# Altium PCB ECG_PCB.PcbDoc
Units mil, origin at the board's own origin, x right, y up, seen from the top; angles counter-clockwise.
Board outline 4759.34 x 1830 mil, 2 copper layers (Top Layer, Bottom Layer); 33 components, 22 nets, 108 pads, 23 vias.
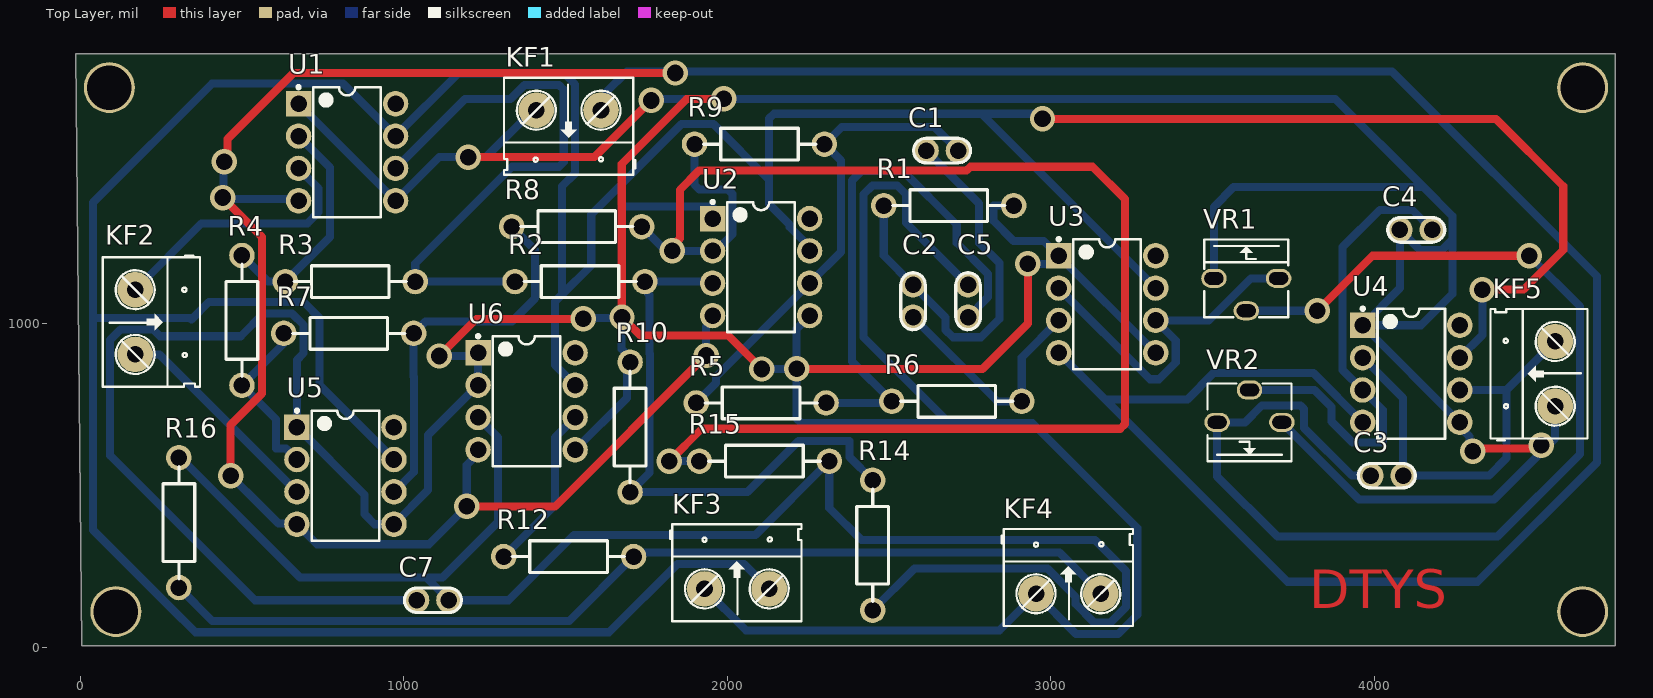
[diagram p0: Top Layer view]
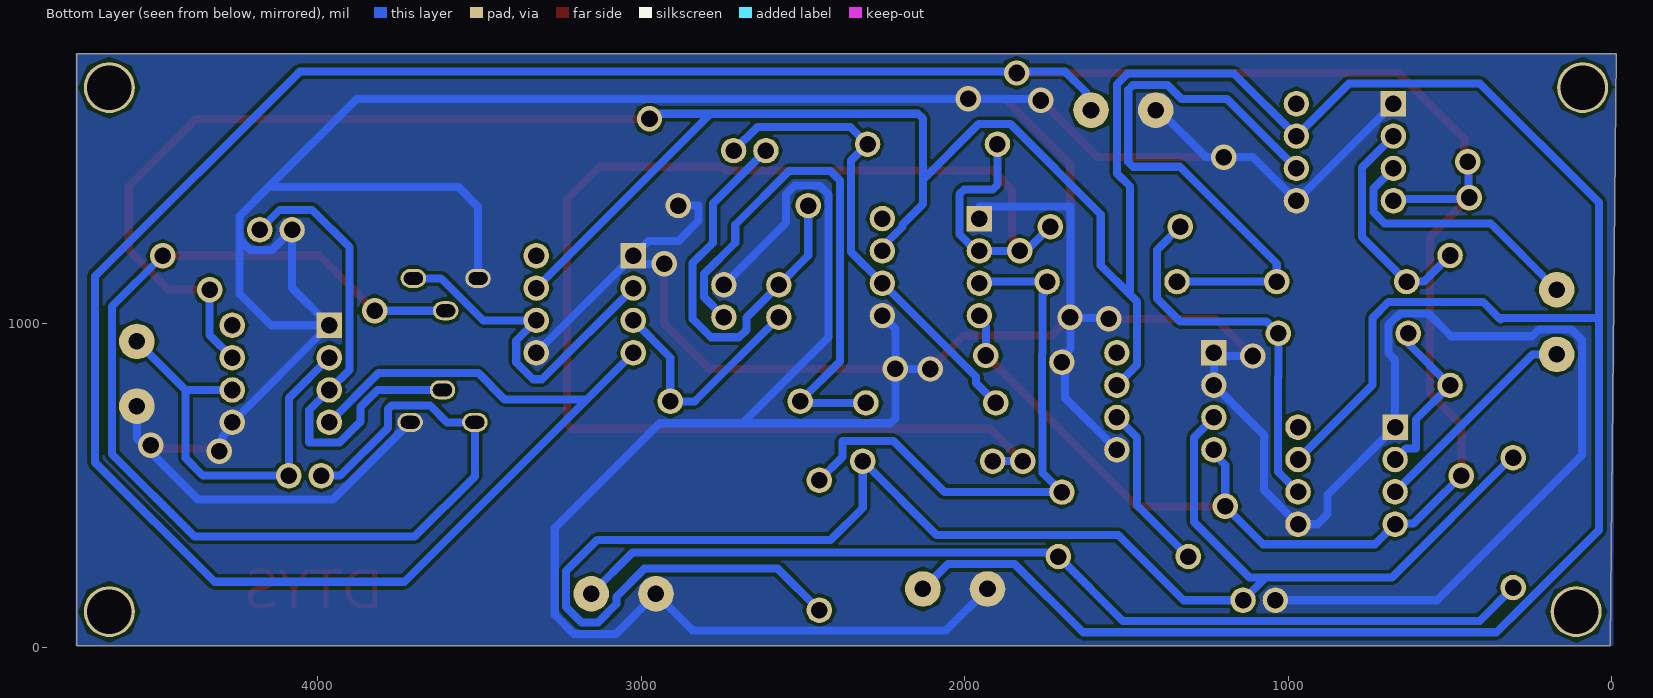
[diagram p1: Bottom Layer view, seen from below]
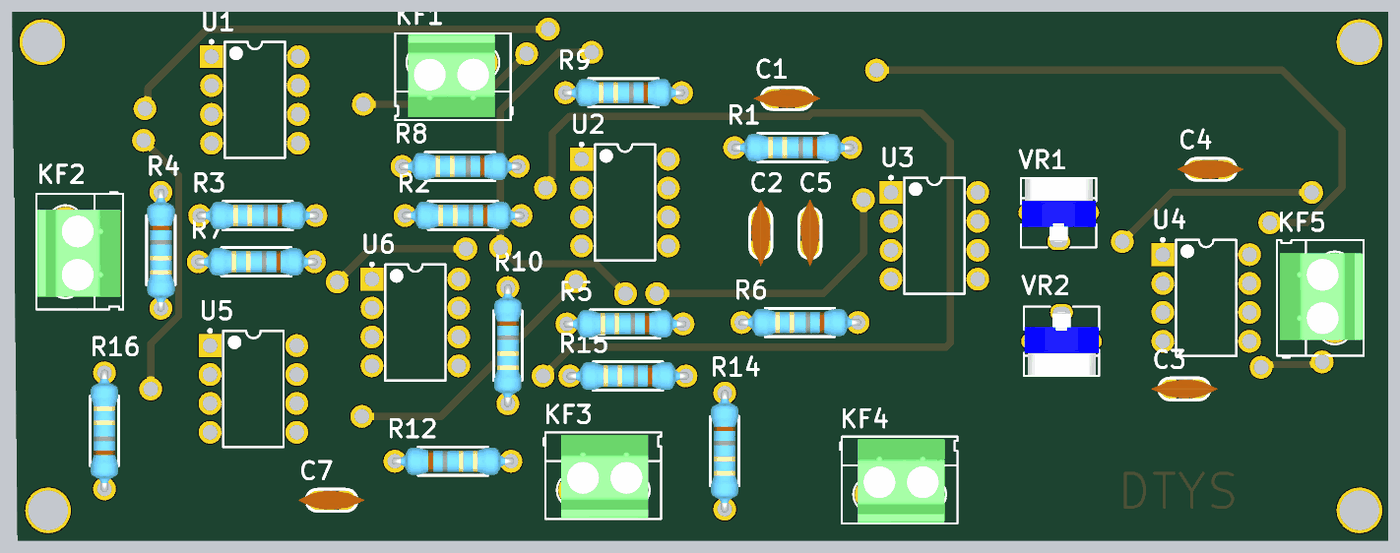
[diagram p2: 3D render of the assembled board from above, using the file's embedded part models]

## Layer stack, top to bottom
Top Solder: solder mask 0.4, Solder Resist, Dk 3.5
Top Layer: signal copper 1.4
Dielectric 1: dielectric 12.6, FR-4, Dk 4.8
Bottom Layer: signal copper 1.4
Bottom Solder: solder mask 0.4, Solder Resist, Dk 3.5

## Board outline
-14.34,1835 4745,1835 4745,5 4.29,5

## Design rules (kind name [scope] priority, off if disabled: settings)
Clearance Clearance_1 [All] p1: gap=9.84 ignorepadtopadclearanceinfootprint=FALSE
Clearance [All] p2: gap=9.84 ignorepadtopadclearanceinfootprint=FALSE
PolygonConnect PolygonConnect_2 [All vs IsNamedPolygon('GND_L02_P000')] p1: thpad.connectstyle=Direct thpad.reliefconductorwidth=10 thpad.reliefentries=4 thpad.polygonreliefangle="90 Angle" thpad.airgapwidth=10 smdpad.connectstyle=Relief smdpad.reliefconductorwidth=10 smdpad.reliefentries=4 smdpad.polygonreliefangle="90 Angle" smdpad.airgapwidth=10 via.connectstyle=Direct via.reliefconductorwidth=10 via.reliefentries=4 via.polygonreliefangle="90 Angle" via.airgapwidth=10
PolygonConnect PolygonConnect_1 [All vs IsNamedPolygon('GND_L02_P000')] p2: thpad.connectstyle=Direct thpad.reliefconductorwidth=10 thpad.reliefentries=4 thpad.polygonreliefangle="90 Angle" thpad.airgapwidth=10 smdpad.connectstyle=Relief smdpad.reliefconductorwidth=10 smdpad.reliefentries=4 smdpad.polygonreliefangle="90 Angle" smdpad.airgapwidth=10 via.connectstyle=Direct via.reliefconductorwidth=10 via.reliefentries=4 via.polygonreliefangle="90 Angle" via.airgapwidth=10
PolygonConnect [All] p3: connectstyle=Relief reliefconductorwidth=10 reliefentries=4 polygonreliefangle="90 Angle" airgapwidth=10
RoutingVias [All] p1: holewidth=28 width=50 viastyle="Through Hole" minholewidth=28 minwidth=50 maxholewidth=28 maxwidth=50
SolderMaskExpansion [All] p1: expansion=4 istentingtop=FALSE
Width [All] p1: maxlimit=35 minlimit=20 preferedwidth=25
30 further rules are at their usual default settings.

## Components (designator, comment, footprint, x,y, rotation, side; value= is the part's Value field where it differs from the comment)
C1 "0.1u" "tu gom" 2665,1535 r0 top
C2 "0.1u" "tu gom" 2575,1070 r90 top
C3 "0.1u" "tu gom" 4040,530 r0 top
C4 "0.1u" "tu gom" 4130,1290 r180 top
C5 "0.2u" "tu gom" 2745,1070 r90 top
C7 "100n" "tu gom" 1090,145 r180 top
KF1 "CON 2 KF301" "Con 2 KF301 5.08" 1610,1660 r180 top
KF2 "CON 2 KF301" "Con 2 KF301 5.08" 170,1105 r270 top
KF3 "CON 2 KF301" "Con 2 KF301 5.08" 1930,180 r0 top
KF4 "CON 2 KF301" "Con 2 KF301 5.08" 2955,165 r0 top
KF5 "CON 2 KF301" "Con 2 KF301 5.08" 4560,745 r90 top
R1 "16k" "tro vach 1/4w" 2685,1365 r0 top
R2 "10k" "tro vach 1/4w" 1545,1130 r0 top
R3 "56k" "tro vach 1/4w" 835,1130 r0 top
R4 "1k" "tro vach 1/4w" 500,1010 r90 top
R5 "32k" "tro vach 1/4w" 2105,755 r0 top
R6 "32k" "tro vach 1/4w" 2710,760 r0 top
R7 "56k" "tro vach 1/4w" 830,970 r0 top
R8 "10k" "tro vach 1/4w" 1535,1300 r0 top
R9 "100k" "tro vach 1/4w" 2100,1555 r0 top
R10 "100k" "tro vach 1/4w" 1700,680 r90 top
R12 "110k" "tro vach 1/4w" 1510,280 r180 top
R14 "3k" "tro vach 1/4w" 2450,315 r90 top
R15 "3k" "tro vach 1/4w" 2115,575 r0 top
R16 "3k" "tro vach 1/4w" 305,385 r270 top
U1 "LM741CN/NOPB" P0008A 825,1530 r0 top
U2 "LM741CN/NOPB" P0008A 2105,1175 r0 top
U3 "LM741CN/NOPB" P0008A 3175,1060 r0 top
U4 "LM741CN/NOPB" P0008A 4115,845 r0 top
U5 "B" P0008A 820,530 r0 top
U6 "B" P0008A 1380,760 r0 top
VR1 "7.5k" "Bien Tro Tam Giac Nam" 3705,1140 r90 top
VR2 "7.5k" "Bien Tro Tam Giac Nam" 3515,695 r270 top

## Footprints (in the part's own frame and the unit in brackets; to place one, negate y for a bottom-side part, rotate by r counter-clockwise, add the part's x,y. Pads: shape width x height; smd on the part's side, far side on the other; paste and mask are expansions set on the pad)
"Bien Tro Tam Giac Nam" [mm] "RM063"
  oval 1.5x2 hole 1 slot 1.5 at 90 deg: 1(0,0) 2(-2.54,2.54) 3(0,5.08)
  silkscreen extent -3.05,-0.76 3.05,5.84, body extent -2.68,-0.71 2.95,5.79, height 9.5
"Con 2 KF301 5.08" [mil]
  round 110 hole 51.18: 1(0,0) 2(200,0)
  silkscreen extent -106,-100 300,200, body extent -45,-97 255,190, height 335
P0008A [mm] "DIP, 8-Leads, Body 10.15x6.6mm, Pitch 2.54mm"
  rect 2x2 hole 1.3: 1(-3.81,3.81)
  round 2 hole 1.3: 2(-3.81,1.27) 3(-3.81,-1.27) 4(-3.81,-3.81) 5(3.81,-3.81) 6(3.81,-1.27) 7(3.81,1.27) 8(3.81,3.81)
  silkscreen extent -3.93,-5.1 2.65,5.23, body extent -3.95,-5.07 3.95,5.07, height 5.08
"tro vach 1/4w" [mm]
  round 2 hole 1.3: 1(-5.1,0) 2(5.1,0)
  silkscreen extent -4.39,-1.25 4.42,1.25, body extent -5.38,-1.2 5.38,1.2, height 2.41
"tu gom" [mm] "Tu gom mini"
  round 2 hole 1.3: 1(-1.27,0) 2(1.27,0)
  silkscreen extent -2.25,-0.97 2.22,0.97, body extent -2.92,-0.85 2.92,0.85, height 6.12

## Part data
C1 C2 C3 C4 C5 C7: library part CMP-001-00153-1, "C?m", Chung_Loai=C?m, Component Type=Standard, Design Item ID="Tu gom 47pF 50V", Don_Vi=Con, Ma_Hang=MH004779, Pins=2, So_Chan=2, Source="Tu dien.SchLib", Ten_Linh_Kien="T? g?m 47P 50V"
KF1 KF2 KF3: library part CMP-002-00076-1, "C?m", Chung_Loai=C?m, Component Type=Standard, Design Item ID="CON 2 KF301", Don_Vi=Con, Ma_Hang=MH000987, Pins=2, Source=Connector.SchLib, Ten_Linh_Kien="CON 2 KF301-2P 5.08MM Xanh Dýõng"
KF4 KF5: "Cắm", Chung_Loai=Cắm, Don_Vi=Con, Ma_Hang=MH000987, Ten_Linh_Kien="CON 2 KF301-2P 5.08MM Xanh Dương"
R1 R2 R3 R4 R5 R6 R7 R8 R9 R10 R12: library part CMP-009-00543-1, "C?m", Chung_Loai=C?m, Component Type=Standard, Design Item ID="Tro Vach 1/4W 5% 1.8k", Don_Vi=Con, Ma_Hang=MH007285, Pins=2, So_Chan=2, Source="Dien Tro.SchLib", Ten_Linh_Kien="Tr? V?ch 1/4w 5% 1.8k"
R14 R15 R16: library part "Tro Vach 1/4W 1% 3k", "Cắm", Chung_Loai=Cắm, Don_Vi=Con, Ma_Hang=MH008834, So_Chan=2, Ten_Linh_Kien="Trở Vạch 1/4W 1% 3k"
U1 U2 U3 U4 U5 U6: library part CMP-0055-00162-3, "Operational Amplifier, 8-pin MDIP, Pb-Free", Manufacturer="Texas Instruments", Package Reference=P0008A, PackageTopMarking=NSUZXYTTE#*LM*741CN, PowerWise=N, Code_JEDEC=MS-001-BA, ComponentLink1Description="Datasheet URL", ComponentLink1URL=http://www.ti.com/general/docs/lit/getliterature.tsp?genericPartNumber=LM741&fileType=pdf, CompType=Amplifiers, PackageDescription="MDIP, .365 x .250 x .130in, 8 Lead, .100in Pitch", PinCount=8, RoHS=Y
VR1 VR2: library part CMP-019-000030-1, "C?m", Chung_Loai=C?m, Component Type=Standard, Design Item ID="Bien tro tam giac 10K Nam", Don_Vi=Con, Ma_Hang=MH004025, Pin Count=3, Source="Dien Tro.SchLib", Ten_Linh_Kien="Bi?n Tr? Tam Giác 103-10K RM063 (Chân n?m)"

## Free pads (board coordinates)
  round 157.48 hole 137.8: 2(90,1730) 2(110,110) 2(4645,110) 2(4645,1730)

## Via types
v1: diameter 78.74, hole 51.18, Top Layer to Bottom Layer, 23 vias

## Nets (pads, with @x,y where several pads share a name; then routed paths per layer and width w, separated by ;. In a path a pad name is that pad's centre, name@x,y a point inside that pad or via, vN(x,y) a via of type N, cw(c..) or ccw(c..) an arc to the next point about the centre after c; other vN are vias at no path point)
-VCC: KF3.2 U1.7 U2.7 U3.7 U4.7 U5.7 U6.7 | length 12952.4
  Top Layer w25: v1(2975,1633.29) 4376.71,1633.29 4585,1425 4585,1227.73 4462.27,1105 v1(4335,1105)
  Bottom Layer w25: U5.7 740,810 740,1017.48 690.93,1066.56 397.56,1066.56 344,1013 339.81,1017.19 40,1017.19 ; U6.7 1468,872 1468,1068 1490,1090 ; KF3.2 2052.66,257.34 1846.34,257.34 1635,46 355.94,46 279.44,122.5 40,361.94 40,1017.19 ; U2.7 2255,1237.73 2193.29,1299.44 2193.29,1306.71 2130,1370 2130,1445 ; v1(2975,1633.29) 2960.36,1647.93 2960.36,1649 2786,1649 ; U3.7 2786,1649 ; U4.7 4335,965 v1(4335,1105) ; 40,1017.19 40,1375 408,1743 812,1743 U1.7 1167.84,1772.84 1497.16,1772.84 1530,1740 1530,1464.8 1490,1424.8 1490,1090 ; 1490,1090 1580,1180 1580,1338 1859,1617 1958,1617 2130,1445 ; 2130,1445 2130,1634.36 2144.64,1649 2786,1649
GND: C4.2 C5.2 C7.2 KF1.2 KF3.1 KF4.1 KF5.1 R1.2 R10.2 U1.1 U1.5 U2.1 U2.5 U3.1 U3.5 U4.1 U4.5 U5.1 U5.5 U6.1 U6.2 U6.5 VR1.3 VR2.3 | length 21568.2
  Top Layer w25: v1(1110,900) 1225,1015 v1(1555,1015) ; v1(1200,1515) 1590,1515 v1(1765,1690) ; v1(1990,1695) 1875,1695 1674.08,1494.08 1674.08,1020.92 v1(1675,1020) 1731.71,963.29 2003.54,963.29 v1(2106.96,859.87) ; v1(2215,860) 2790,860 2930,1000 v1(2930,1185) ; v1(4305,605) 4314.32,614.32 4507.04,614.32 v1(4516.36,623.64)
  Bottom Layer w25: U1.1 U1.5 1110,1515 v1(1200,1515) 1255,1515 1400,1660 KF1.2 ; C7.2 540,145 92,593 92,950 124.34,982.34 225.66,982.34 247,961 496.29,961 567,1031.71 654.78,1031.71 690.93,995.56 690.93,908.93 670,888 U5.1 879,471 879,411 910,380 U5.5 1075.71,485.71 1075.71,655.71 U6.2 U6.1 1220,900 v1(1110,900) ; U6.5 1690,770 1690,870.79 R10.2 1700,895.33 1674,921.33 v1@1674,1019 ; v1(1555,1015) 1557.5,1017.5 1672.5,1017.5 v1@1674,1019 ; v1(1675,1020) v1@1674,1019 ; v1(1765,1690) 1770,1695 v1(1990,1695) 3880,1695 4153,1422 ; KF3.1 2058,52 2842,52 KF4.1 3079,41 3209,41 3268,100 3268,368 2943.97,692.03 2684.51,692.03 ; U2.1 1955,1362 1674,1362 v1@1674,1019 ; v1(2106.96,859.87) v1(2106.96,859.87) 2214.94,859.94 v1(2215,860) ; U2.5 2255,1023.49 2215,983.49 v1(2215,860) ; C5.2 2553,1312 2553,1400 2526,1427 2449,1427 2422,1400 2422,958 2686.24,693.76 2684.51,692.03 ; R1.2@2890.79,1360 R1.2 2823,1365 2823,1318 2885,1256 2979,1256 U3.1 ; v1(2930,1185) 3000,1185 U3.1 ; U3.5 U3.1 ; VR1.3@3502.5,1142.5 VR1.3 3505,1361 3566,1422 4153,1422 ; VR2.3 3954,456 4370.63,456 v1@4527.31,612.68 ; v1(4305,605) 4294.72,615.28 4294.72,650.74 4265,680.46 U4.5 U4.1 ; v1(4516.36,623.64) v1@4527.31,612.68 ; KF5.1 4560,645.37 v1@4527.31,612.68 ; v1(2215,860) 2215,706.68 2229.64,692.03 2684.51,692.03 ; U4.1 4145,995 4242,1092 4242,1260 ; U4.1 4080,1110 C4.2 4142,1228 4210,1228 4242,1260 ; 4153,1422 4242,1333 4242,1260
NetC1_1: C1.1 C2.2 R1.1 | length 1277.2
  Bottom Layer w25: R1.1 2484.21,1210.79 C2.2 2675.61,1019.39 2675.61,980.46 2698.07,958 2785,958 2842,1015 2842,1187.02 2779.02,1250 2779.02,1370.98 C1.1
NetC1_2: C1.2 R5.1 R9.2 U2.6 | length 1473.2
  Bottom Layer w25: R5.1 1965.92,816.71 1965.92,835.92 U2.6 2351.56,1221.56 2351.56,1504.23 R9.2 2354.3,1608.51 2641.49,1608.51 C1.2
NetC2_1: C2.1 R6.2 U3.3 | length 740.8
  Bottom Layer w25: C2.1 2835,760 R6.2 2910.79,895.79 U3.3
NetC3_1: C3.1 VR1.2 VR2.1 | length 3715.9
  Top Layer w25: v1(3825,1040) 3995,1210 v1(4480,1210)
  Bottom Layer w25: VR1.2 v1(3825,1040) ; C3.1 3931.9,530 3783.98,677.92 3783.98,736.02 3773,747 3653,747 3601,695 VR2.1 3515,528 3701,342 4382,342 4637.34,597.34 4637.34,1052.66 v1(4480,1210)
NetC3_2: C3.2 KF5.2 U4.2 U4.6 | length 1326.7
  Bottom Layer w25: U4.2 4090,770 C3.2 4355,530 4410,585 4410,795 ; U4.6 4410,795 ; KF5.2 4410,795
NetC4_1: C4.1 U4.3 VR2.2 | length 1511
  Bottom Layer w25: VR2.2 3815.72,795 3868.44,742.28 3868.44,697.56 3933,633 4027,633 4027,733 U4.3 3903,857 3903,1237 4018,1352 4118,1352 C4.1
NetC5_1: C5.1 R5.2 R6.1 | length 1697.8
  Bottom Layer w25: R5.2 2487.23,755 2487.23,760 R6.1 2386.4,882.81 2386.4,1442.4 2415.67,1471.67 2544.2,1471.67 2710,1305.87 2710,1250 2807,1153 2807,1082 C5.1
NetC7_1: C7.1 R14.1 R15.2 R16.1 U6.3 | length 5205.8
  Bottom Layer w25: R16.1 309.21,585.79 680,215 1070,215 ; U6.3 1292,648 1292,387 1120,215 1070,215 ; R14.1 2578.79,243 2990,243 3077.66,155.34 3077.66,132.96 3134.62,76 3185,76 3233,124 3233,235 3137,331 2415,331 2315.79,430.21 R15.2 2087.7,346.92 1526,346.92 1324.08,145 C7.1 1070,215
NetKF2_1: KF2.1 U1.3 | length 827.1
  Bottom Layer w25: KF2.1 375.31,1310.31 702.31,1310.31 737,1345 737,1418 U1.3
NetKF2_2: KF2.2 U5.3 | length 676
  Bottom Layer w25: KF2.2 245,905 U5.3
NetKF4_2: KF4.2 R12.1 R16.2 | length 3040
  Bottom Layer w25: R16.2 408.17,81.05 1511.83,81.05 R12.1 1735.94,280 1735.94,292.19 3027.81,292.19 KF4.2
NetR2_1: R2.1 R3.2 U1.6 | length 1810.1
  Bottom Layer w25: U1.6 1190,1695 1330,1695 1373,1738 1480.36,1738 1495,1723.36 1495,1499.64 1480.36,1485 1335,1485 1035.79,1185.79 R3.2 R2.1
NetR2_2: R2.2 R10.1 R14.2 U2.3 | length 1788.6
  Bottom Layer w25: U2.3 1950,1130 1756.07,1130 R2.2 1756.07,1119.72 1756.07,1092.41 1760,1088.49 1760,908.06 1761.71,906.35 1761.71,723.64 1760,721.92 1760,539.21 R10.1 2063.21,479.21 2221,637 2378,637 2378,587.79 R14.2
NetR3_1: R3.1 R4.2 U1.2 | length 714.8
  Bottom Layer w25: R4.2 580.79,1130 R3.1 771.84,1267.63 771.84,1483.16 U1.2
NetR4_1: R4.1 R7.1 U5.2 | length 532.3
  Bottom Layer w25: R7.1 629.21,938.42 R4.1 604.78,704.43 604.78,613.84 636.16,613.84 U5.2
NetR7_2: R7.2 R8.1 U5.6 | length 1187.9
  Bottom Layer w25: U5.6 1032,542 1032,836 1030.79,837.21 R7.2 1067.79,1007 1335,1007 1406,1078 1406,1228.21 R8.1
NetR8_2: R8.2 R9.1 R15.1 U2.2 | length 4601.6
  Top Layer w25: v1(1821.71,575) 1921.71,675 3215.36,675 3230,689.64 3230,1385 3130,1485 2752.27,1485 2740.56,1473.29 1913.29,1473.29 1853.83,1413.83 1853.83,1263.38 1830,1239.54 v1(1830,1225)
  Bottom Layer w25: R8.2 1810.79,1225 v1(1830,1225) U2.2 1965.34,1225 2016.71,1276.38 2016.71,1400.36 2002.07,1415 1913.86,1415 1899.21,1429.64 R9.1 ; v1(1821.71,575) R15.1
NetR12_2: R12.2 U6.6 | length 521.5
  Bottom Layer w25: R12.2 1468,438.79 1468,648 U6.6
NetU3_2: U3.2 U3.6 VR1.1 | length 1089.8
  Bottom Layer w25: U3.2 3306.95,828.05 3335,828.05 3387,880.05 3387,948 U3.6 3489,1010 3619,1140 VR1.1
VCC: KF1.1 U1.4 U2.4 U3.4 U4.4 U5.4 U6.4 | length 11967.1
  Top Layer w25: v1@435,1395 v1(440,1390) 561.71,1268.29 561.71,783.65 465,686.94 v1(465,530) ; v1(445,1500) 455.28,1510.28 455.28,1570.62 659.66,1775 v1(1840,1775) ; v1(1195,435) 1468.43,435 v1(1935,901.57)
  Bottom Layer w25: v1(445,1500) 442.5,1497.5 442.5,1392.5 v1(440,1390) 444.78,1385.22 669.78,1385.22 U1.4 ; v1(465,530) 560,435 613.14,381.86 668.14,381.86 732,318 1078,318 v1(1195,435) 1195,563.49 1230,598.49 U6.4 ; KF1.1 1626.26,1676.26 1626.26,1716.26 1690,1780 4055.82,1780 4689.34,1146.47 4689.34,571.01 4320.34,202 3733,202 3169,766 ; v1(1935,901.57) 1935,990.46 1955,1010.46 U2.4 ; U3.4 3169,766 ; U4.4 3813,847 3504,847 3423,766 3169,766
pads on no net: U1.8 U2.8 U3.8 U4.8 U5.8 U6.8

## Polygon pours and split planes (outlines as drawn)
GND on Bottom Layer "GND_L02_P000" (solid, pour order 0): -10,1835 4749.34,1835 4749.34,5 -4.26,5

## Other copper
Top Layer:
  text "DTYS" at 3800,120 h118.11

## Silkscreen, mask and mechanical layers (free items; w line width, h text height)
Mechanical 1:
  lines w47.24: -14.34,1835 4.29,5 4750,5 4750,1835 -14.34,1835